# Altium PCB Adapter.PcbDoc
Units mil, origin at the board's own origin, x right, y up, seen from the top; angles counter-clockwise.
Board outline 6000 x 6000 mil, 2 copper layers (Top Layer, Bottom Layer); 94 components, 81 nets, 243 pads, 0 vias.
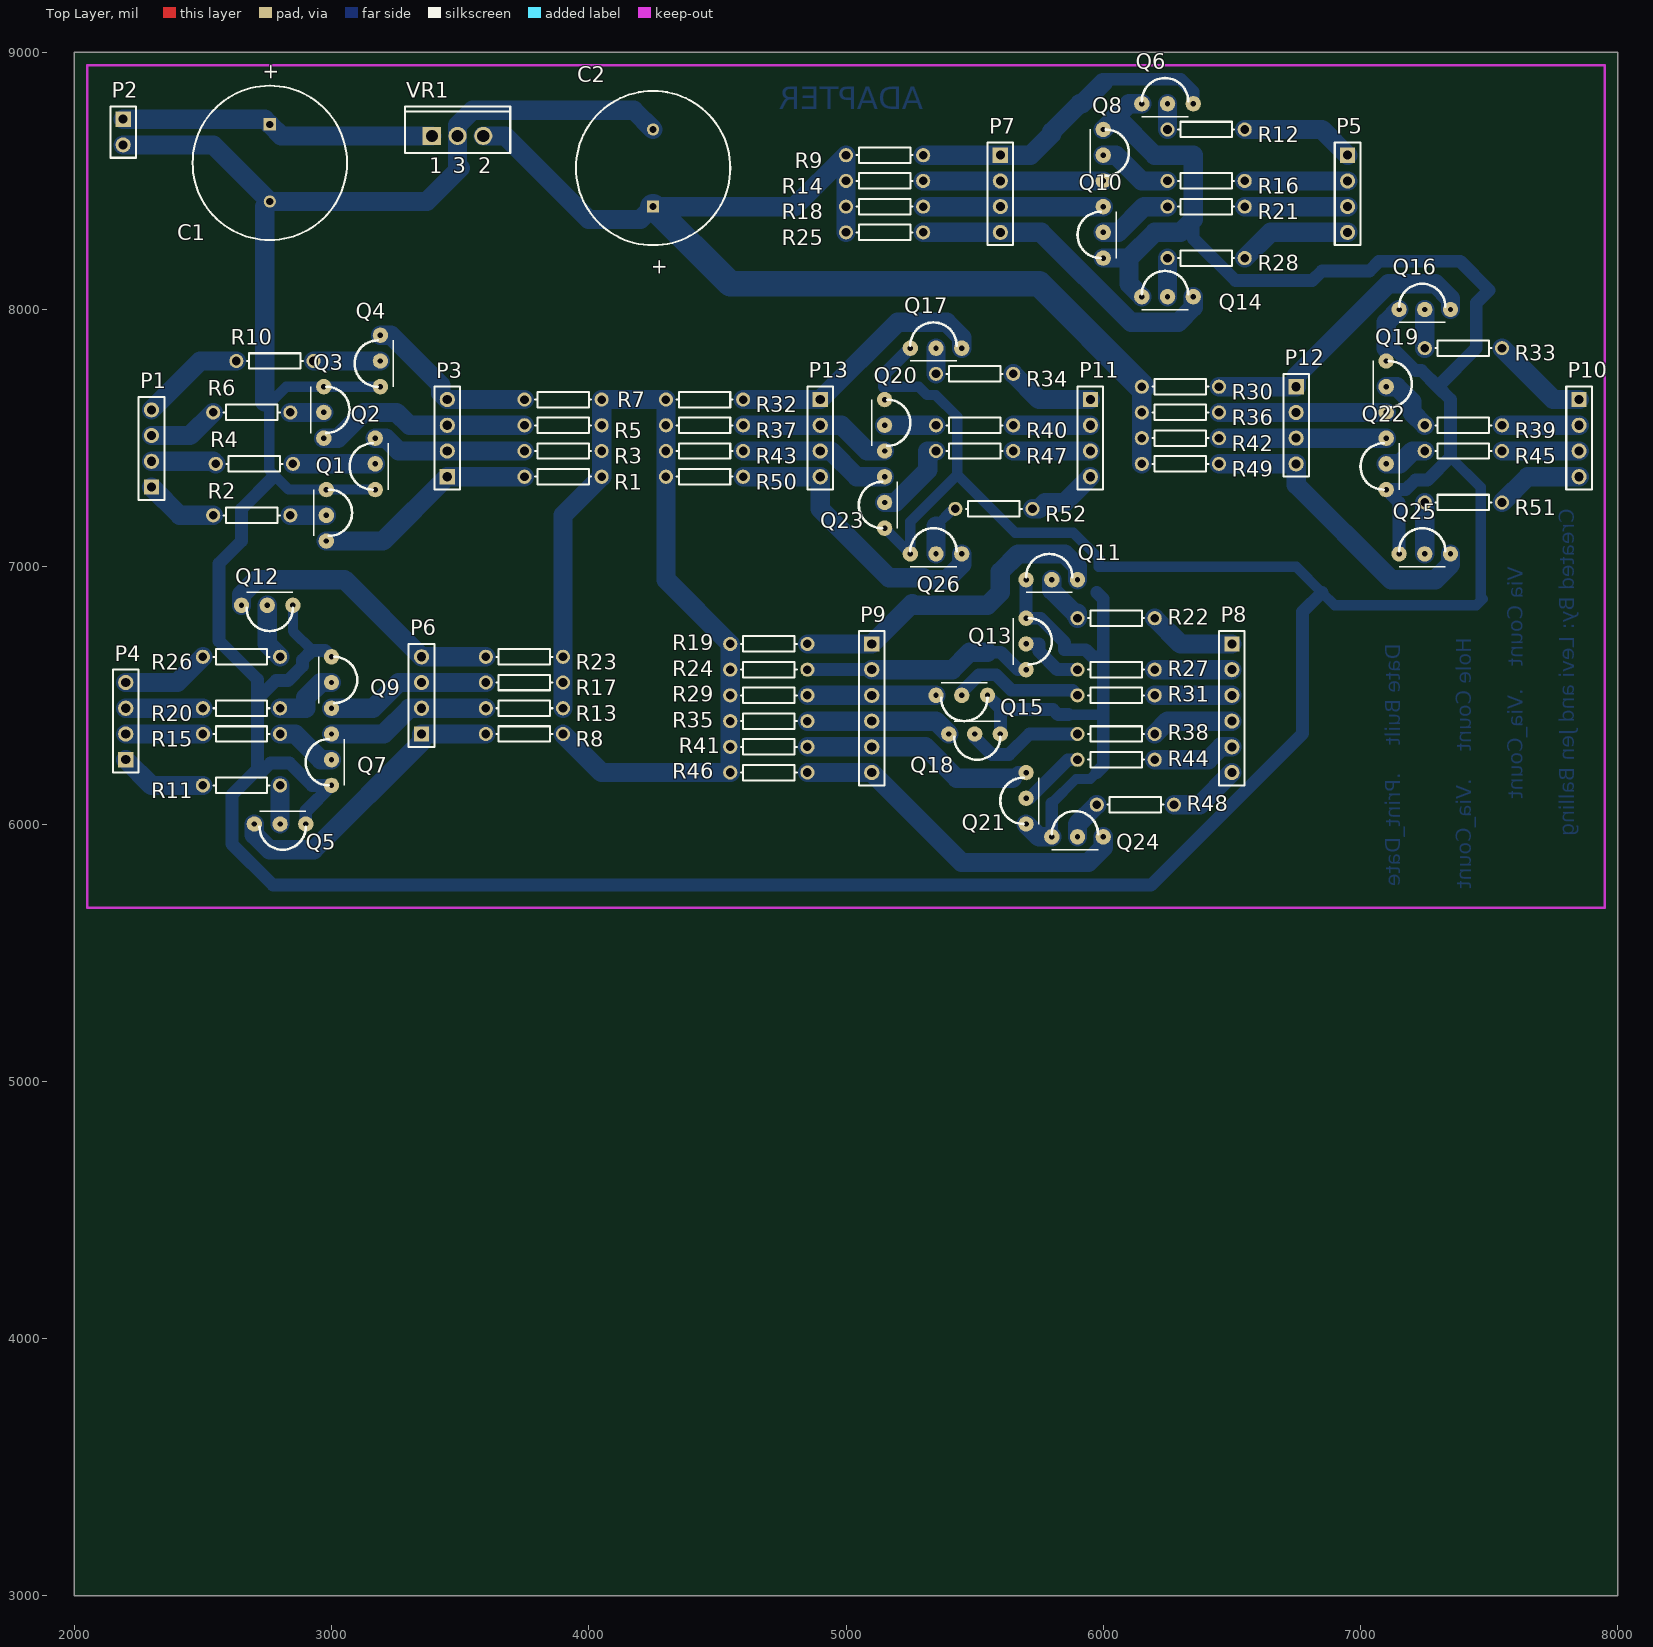
[diagram p0: Top Layer view]
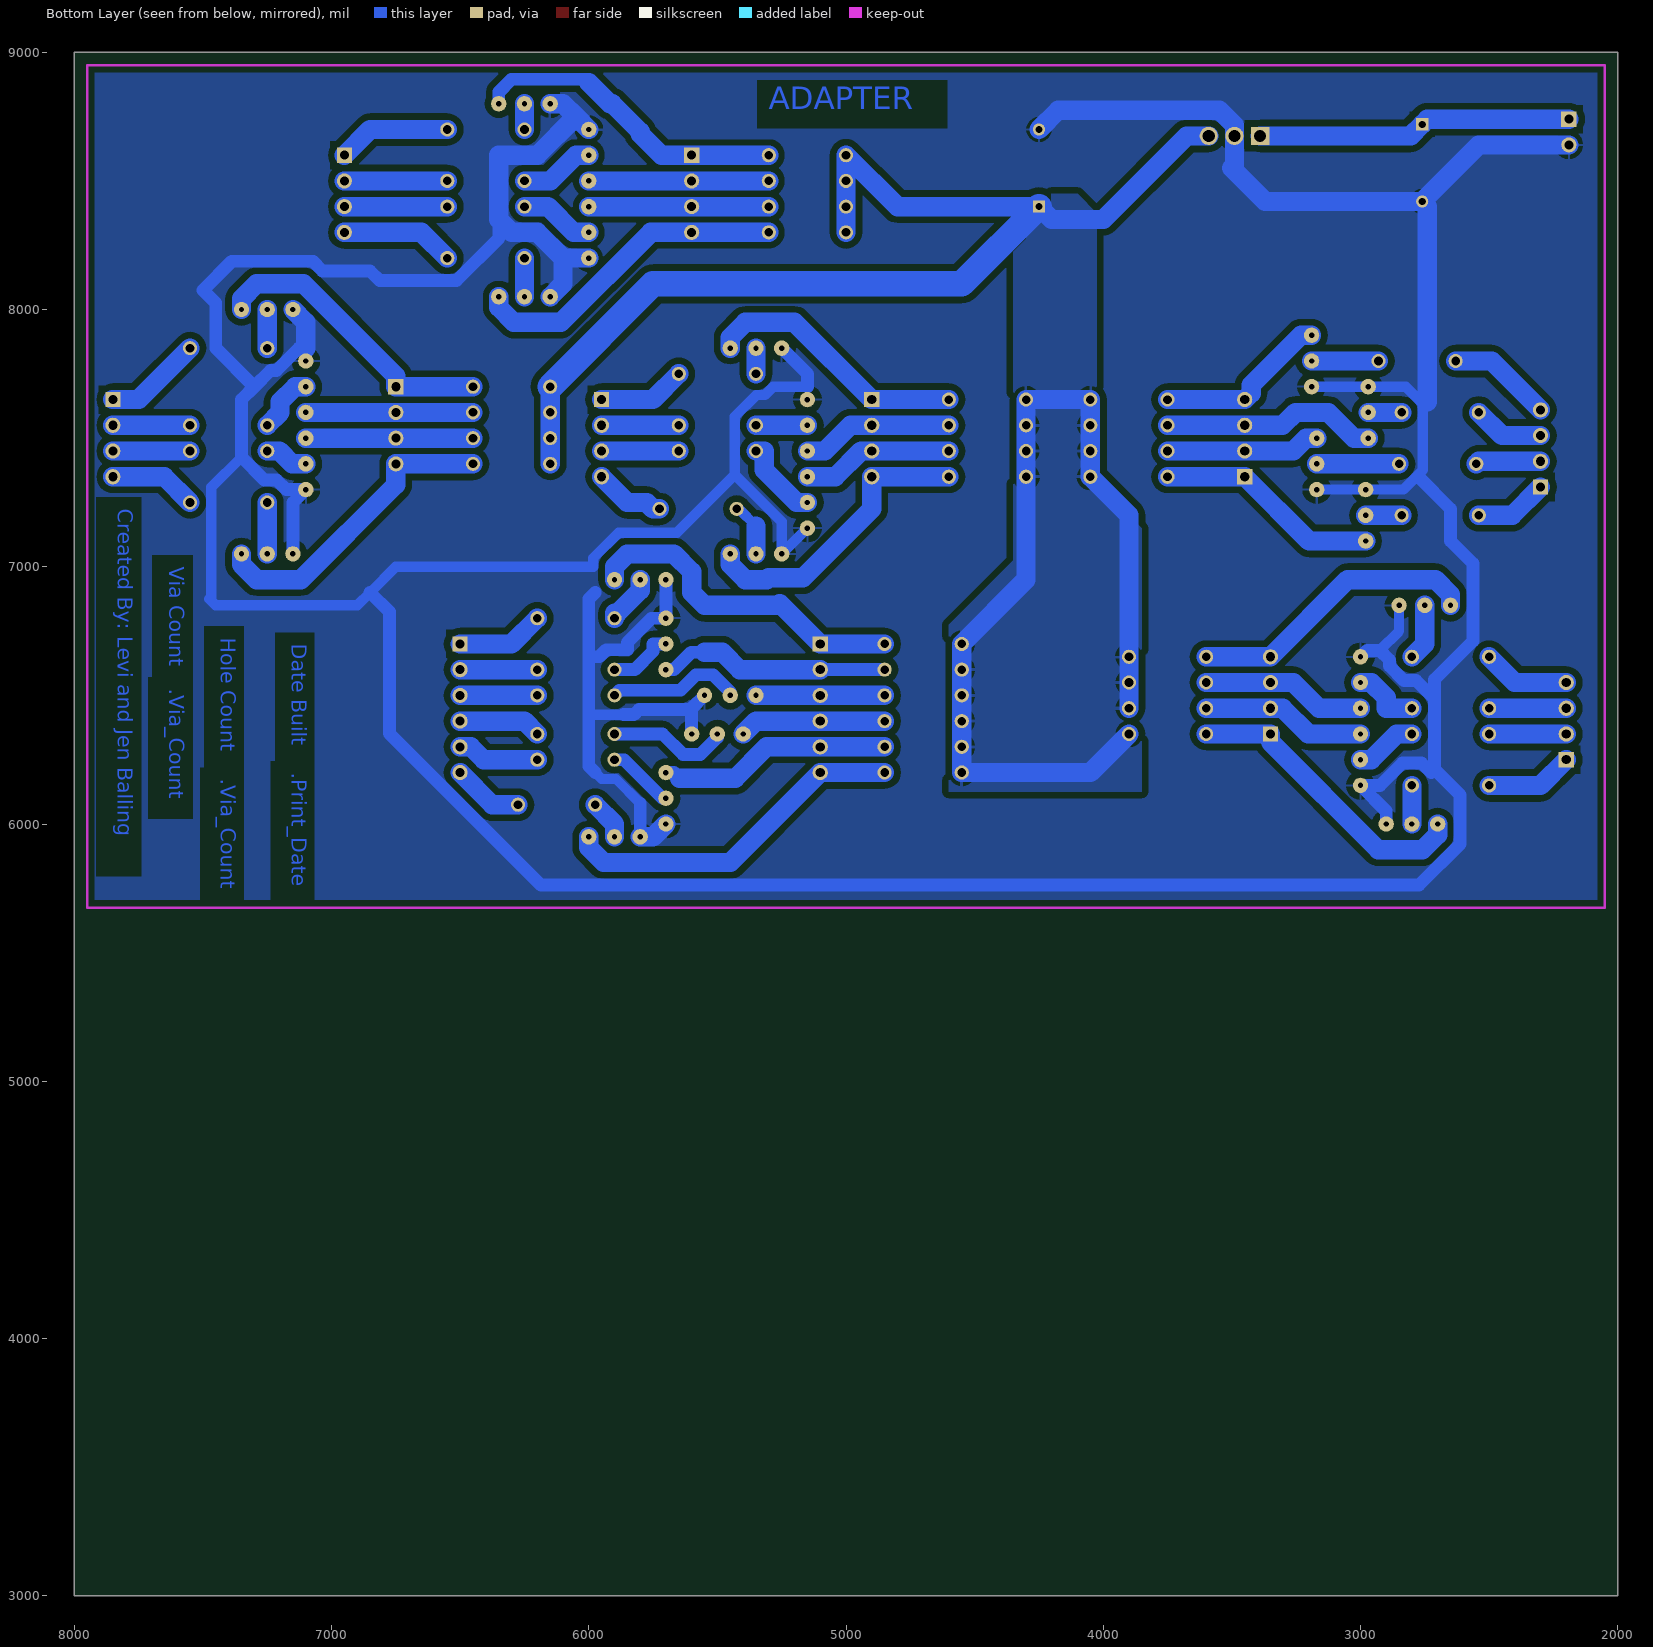
[diagram p1: Bottom Layer view, seen from below]

## Layer stack, top to bottom
Top Layer: signal copper 1.4
Dielectric: dielectric 12.6, FR-4, Dk 4.8
Bottom Layer: signal copper 1.4

## Board outline
2000,3000 8000,3000 8000,9000 2000,9000

## Design rules (kind name [scope] priority, off if disabled: settings)
Clearance [All] p1: gap=25
PolygonConnect [All] p1: connectstyle=Relief reliefconductorwidth=10 reliefentries=4 polygonreliefangle="90 Angle"
RoomDefinition Adapter [InComponentClass('Adapter')] p1: confinementstyle=ConfineIn formatcopy=TRUE lockcomponents=FALSE outline 7950,8950 2050,8950 2050,5675 7950,5675
RoutingVias [All] p1: holewidth=32 width=100 viastyle="Through Hole" minholewidth=28 minwidth=50 maxholewidth=28 maxwidth=50
SilkscreenOverComponentPads [All] p1: minsilkscreentomaskgap=10
SolderMaskExpansion [All] p1: expansion=4
Width [All] p1: maxlimit=100 minlimit=25 preferedwidth=50 minimp=50.000000 maximp=50.000000 favimp=50.000000
27 further rules are at their usual default settings.

## Components (designator, comment, footprint, x,y, rotation, side; value= is the part's Value field where it differs from the comment)
C1 "Cap Pol1" RB7.6-15 2760,8570 r90 top
C2 "Cap Pol1" RB7.6-15 4250,8550 r270 top
P1 "Header 4" HDR1X4 2300,7310 r90 top
P2 "Header 2" HDR1X2 2190,8740 r270 top
P3 "Header 4" HDR1X4 3450,7350 r90 top
P4 "Header 4" HDR1X4 2200,6250 r90 top
P5 "Header 4" HDR1X4 6950,8600 r270 top
P6 "Header 4" HDR1X4 3350,6350 r90 top
P7 "Header 4" HDR1X4 5600,8600 r270 top
P8 "Header 6" HDR1X6 6500,6700 r270 top
P9 "Header 6" HDR1X6 5100,6700 r270 top
P10 "Header 4" HDR1X4 7850,7650 r270 top
P11 "Header 4" HDR1X4 5950,7650 r270 top
P12 "Header 4" HDR1X4 6750,7700 r270 top
P13 "Header 4" HDR1X4 4900,7650 r270 top
Q1 "2N3904" 2N3904 2980,7300 r270 top
Q2 "2N3904" 2N3904 3170,7300 r90 top
Q3 "2N3904" 2N3904 2970,7700 r270 top
Q4 "2N3904" 2N3904 3190,7700 r90 top
Q5 "2N3904" 2N3904 2900,6000 r180 top
Q6 "2N3904" 2N3904 6150,8800 r0 top
Q7 "2N3904" 2N3904 3000,6150 r90 top
Q8 "2N3904" 2N3904 6000,8700 r270 top
Q9 "2N3904" 2N3904 3000,6650 r270 top
Q10 "2N3904" 2N3904 6000,8200 r90 top
Q11 "2N3904" 2N3904 5700,6950 r0 top
Q12 "2N3904" 2N3904 2850,6850 r180 top
Q13 "2N3904" 2N3904 5700,6800 r270 top
Q14 "2N3904" 2N3904 6150,8050 r0 top
Q15 "2N3904" 2N3904 5550,6500 r180 top
Q16 "2N3904" 2N3904 7150,8000 r0 top
Q17 "2N3904" 2N3904 5250,7850 r0 top
Q18 "2N3904" 2N3904 5600,6350 r180 top
Q19 "2N3904" 2N3904 7100,7800 r270 top
Q20 "2N3904" 2N3904 5150,7650 r270 top
Q21 "2N3904" 2N3904 5700,6000 r90 top
Q22 "2N3904" 2N3904 7100,7300 r90 top
Q23 "2N3904" 2N3904 5150,7150 r90 top
Q24 "2N3904" 2N3904 5800,5950 r0 top
Q25 "2N3904" 2N3904 7150,7050 r0 top
Q26 "2N3904" 2N3904 5250,7050 r0 top
R1 "Res1" AXIAL-0.3 3900,7350 r180 top
R2 "Res1" AXIAL-0.3 2690,7200 r0 top
R3 "Res1" AXIAL-0.3 3900,7450 r180 top
R4 "Res1" AXIAL-0.3 2700,7400 r0 top
R5 "Res1" AXIAL-0.3 3900,7550 r180 top
R6 "Res1" AXIAL-0.3 2690,7600 r0 top
R7 "Res1" AXIAL-0.3 3900,7650 r180 top
R8 "Res1" AXIAL-0.3 3750,6350 r180 top
R9 "Res1" AXIAL-0.3 5150,8600 r0 top
R10 "Res1" AXIAL-0.3 2780,7800 r0 top
R11 "Res1" AXIAL-0.3 2650,6150 r0 top
R12 "Res1" AXIAL-0.3 6400,8700 r180 top
R13 "Res1" AXIAL-0.3 3750,6450 r180 top
R14 "Res1" AXIAL-0.3 5150,8500 r0 top
R15 "Res1" AXIAL-0.3 2650,6350 r0 top
R16 "Res1" AXIAL-0.3 6400,8500 r180 top
R17 "Res1" AXIAL-0.3 3750,6550 r180 top
R18 "Res1" AXIAL-0.3 5150,8400 r0 top
R19 "Res1" AXIAL-0.3 4700,6700 r0 top
R20 "Res1" AXIAL-0.3 2650,6450 r0 top
R21 "Res1" AXIAL-0.3 6400,8400 r180 top
R22 "Res1" AXIAL-0.3 6050,6800 r180 top
R23 "Res1" AXIAL-0.3 3750,6650 r180 top
R24 "Res1" AXIAL-0.3 4700,6600 r0 top
R25 "Res1" AXIAL-0.3 5150,8300 r0 top
R26 "Res1" AXIAL-0.3 2650,6650 r0 top
R27 "Res1" AXIAL-0.3 6050,6600 r180 top
R28 "Res1" AXIAL-0.3 6400,8200 r180 top
R29 "Res1" AXIAL-0.3 4700,6500 r0 top
R30 "Res1" AXIAL-0.3 6300,7700 r0 top
R31 "Res1" AXIAL-0.3 6050,6500 r180 top
R32 "Res1" AXIAL-0.3 4450,7650 r0 top
R33 "Res1" AXIAL-0.3 7400,7850 r180 top
R34 "Res1" AXIAL-0.3 5500,7750 r180 top
R35 "Res1" AXIAL-0.3 4700,6400 r0 top
R36 "Res1" AXIAL-0.3 6300,7600 r0 top
R37 "Res1" AXIAL-0.3 4450,7550 r0 top
R38 "Res1" AXIAL-0.3 6050,6350 r180 top
R39 "Res1" AXIAL-0.3 7400,7550 r180 top
R40 "Res1" AXIAL-0.3 5500,7550 r180 top
R41 "Res1" AXIAL-0.3 4700,6300 r0 top
R42 "Res1" AXIAL-0.3 6300,7500 r0 top
R43 "Res1" AXIAL-0.3 4450,7450 r0 top
R44 "Res1" AXIAL-0.3 6050,6250 r180 top
R45 "Res1" AXIAL-0.3 7400,7450 r180 top
R46 "Res1" AXIAL-0.3 4700,6200 r0 top
R47 "Res1" AXIAL-0.3 5500,7450 r180 top
R48 "Res1" AXIAL-0.3 6125,6075 r180 top
R49 "Res1" AXIAL-0.3 6300,7400 r0 top
R50 "Res1" AXIAL-0.3 4450,7350 r0 top
R51 "Res1" AXIAL-0.3 7400,7250 r180 top
R52 "Res1" AXIAL-0.3 5575,7225 r180 top
VR1 "L7805CP" ISOWATT220AB 3490,8675 r0 top

## Footprints (in the part's own frame and the unit in brackets; to place one, negate y for a bottom-side part, rotate by r counter-clockwise, add the part's x,y. Pads: shape width x height; smd on the part's side, far side on the other; paste and mask are expansions set on the pad)
2N3904 [mil] "simple transistor, but bigger holes and pads"
  round 60 hole 21: 1(0,0) 2(100,0) 3(200,0)
  silkscreen extent 0,-50 180,100
AXIAL-0.3 [mm] "Axial Device, Thru-Hole; 2 Leads; 0.3 in Pin Spacing"
  round 1.4 hole 0.85: 1(-3.81,0) 2(3.81,0)
  silkscreen extent -2.77,-0.76 2.77,0.76
HDR1X2 [mm] "Connector; Header; 2 Position"
  rect 1.5x1.5 hole 0.9: 1(0,0)
  round 1.5 hole 0.9: 2(2.54,0)
  silkscreen extent -1.27,-1.27 3.81,1.27
HDR1X4 [mm] "Connector; Header; 4 Position"
  rect 1.5x1.5 hole 0.9: 1(0,0)
  round 1.5 hole 0.9: 2(2.54,0) 3(5.08,0) 4(7.62,0)
  silkscreen extent -1.27,-1.27 8.89,1.27
HDR1X6 [mm] "Connector; Header; 6 Position"
  rect 1.5x1.5 hole 0.9: 1(0,0)
  round 1.5 hole 0.9: 2(2.54,0) 3(5.08,0) 4(7.62,0) 5(10.16,0) 6(12.7,0)
  silkscreen extent -1.27,-1.27 13.97,1.27
ISOWATT220AB [mm] "TO, Thru-Hole, Vertical, Heatsink Mounted; 3 In-Line Leads; Pitch 2.54 mm; Pin sequence 1, 3, 2"
  rect 1.8x1.8 hole 1.2: 1(-2.54,0)
  round 1.8 hole 1.2: 2(2.54,0) 3(0,0)
  silkscreen extent -5.2,-1.7 5.2,2.9
RB7.6-15 [mm] "Polarized Capacitor (Radial); 2 Leads"
  rect 1.2x1.2 hole 0.7: 1(3.81,0)
  round 1.2 hole 0.7: 2(-3.81,0)
  silkscreen extent -7.62,-7.62 7.62,7.62

## Part data
C1 C2: "Polarized Capacitor (Radial)"
P1 P3 P4 P5 P6 P7 P10 P11 P12 P13: "Header, 4-Pin"
P2: "Header, 2-Pin"
P8 P9: "Header, 6-Pin"
Q1 Q2 Q3 Q4 Q5 Q6 Q7 Q8 Q9 Q10 Q11 Q12 Q13 Q14 Q15 Q16 Q17 Q18 Q19 Q20 Q21 Q22 Q23 Q24 Q25 Q26: "NPN General Purpose Amplifier"
R1 R2 R3 R4 R5 R6 R7 R8 R9 R10 R11 R12 R13 R14 R15 R16 R17 R18 R19 R20 R21 R22 R23 R24 R25 R26 R27 R28 R29 R30 R31 R32 R33 R34 R35 R36 R37 R38 R39 R40 R41 R42 R43 R44 R45 R46 R47 R48 R49 R50 R51 R52: "Resistor"
VR1: "Positive Voltage Regulator"

## Nets (pads, with @x,y where several pads share a name; then routed paths per layer and width w, separated by ;. In a path a pad name is that pad's centre, name@x,y a point inside that pad or via, vN(x,y) a via of type N, cw(c..) or ccw(c..) an arc to the next point about the centre after c; other vN are vias at no path point)
+5: C2.1 R1.1 R3.1 R5.1 R7.1 R8.1 R9.1 R13.1 R14.1 R17.1 R18.1 R19.1 R23.1 R24.1 R25.1 R29.1 R30.1 R32.1 R35.1 R36.1 R37.1 R41.1 R42.1 R43.1 R46.1 R49.1 R50.1 VR1.2 | length 8215.9
  Bottom Layer w75: VR1.2 3675,8675 4000,8350 4200,8350 C2.1 4800,8400 R9.1 R14.1 R18.1 R25.1 ; R8.1 4050,6200 R46.1 R41.1 R35.1 R29.1 R24.1 R19.1 4300,6950 R50.1 R43.1 R37.1 R32.1 R7.1 R5.1 R3.1 R1.1 3900,7200 R23.1 R17.1 R13.1 ; R49.1 R42.1 R36.1 R30.1
  Bottom Layer w100: C2.1 4550,8100 5750,8100 R30.1
+12: C1.1 P2.1 VR1.1 | length 1226.9
  Bottom Layer w75: P2.1 2740,8740 C1.1 2805,8675 VR1.1
GND: C1.2 C2.2 P2.2 Q1.1 Q2.1 Q3.1 Q4.1 Q5.1 Q6.1 Q7.1 Q8.1 Q9.1 Q10.1 Q11.1 Q12.1 Q13.1 Q14.1 Q15.1 Q16.1 Q17.1 Q18.1 Q19.1 Q20.1 Q21.1 Q22.1 Q23.1 Q24.1 Q25.1 Q26.1 VR1.3 | length 23180.9
  Bottom Layer w40: Q12.1 2850,6750 2925,6675 ; Q2.1 Q1.1 2833.33,7300 2757.5,7375.83 2757.5,7634.17 2823.33,7700 Q3.1 Q4.1 ; Q23.1 Q26.1 5250,7175 5432.5,7357.5 ; 5150,7700 5283.33,7700 5315.83,7667.5 5349.17,7667.5 5432.5,7584.17 5432.5,7357.5 ; 5800,6080.8 5894.2,6175 5950,6175 5975,6200 ; 5865.31,6425 6000,6425 ; 7350,7426.26 7467.5,7308.76 7467.5,6882.5 7475,6875 7450,6850 6900,6850 6850,6900 6750,7000 5982.5,7000 5982.5,7034.17 5884.17,7132.5 5657.5,7132.5 5432.5,7357.5
  Bottom Layer w50: 2775.63,7350.63 2650,7225 2650,7100 2562.5,7012.5 2562.5,6711.24 2712.5,6561.24 2712.5,6486.24 ; Q5.1 2900,6050 Q7.1 2923.74,6150 2836.24,6237.5 2762.5,6237.5 2725,6200 2712.5,6212.5 ; Q9.1 2975,6675 2925,6675 2887.5,6637.5 2887.5,6613.76 2831.33,6557.58 2783.84,6557.58 2712.5,6486.24 ; 5150,7700 5150,7750 Q17.1 ; Q15.1 5600,6450 ; Q18.1 5600,6450 ; Q11.1 Q13.1 5756.07,6800 5850,6706.07 5850,6677.56 5932.13,6677.56 5959.69,6650 6000,6650 ; Q24.1 5800,6080.8 ; 5865.31,6425 5825,6425 5805,6445 5605,6445 5600,6450 ; 5975,6200 6000,6225 6000,6425 6000,6650 ; 5975,6900 6000,6875 6000,6650 ; 6350,8350 6350,8276.26 6513.76,8112.5 6812.5,8112.5 6850,8150 7034.84,8150 7072.34,8187.5 7387.5,8187.5 7500,8075 7450,8025 7450,7850 7300,7700 ; 6850,6900 6775,6825 6775,6351.26 6186.24,5762.5 2772.34,5762.5 2612.5,5922.34 2612.5,6112.5 2712.5,6212.5 ; 7100,7850 7126.26,7850 7213.76,7762.5 7237.5,7762.5 7300,7700 ; Q25.1 7150,7250 Q22.1 7176.26,7300 7213.76,7337.5 7261.24,7337.5 7350,7426.26 7350,7650 7300,7700 ; 2712.5,6212.5 2712.5,6486.24
  Bottom Layer w75: P2.2 2540,8640 C1.2 ; 2745.13,7646.55 2740,7641.42 2740,8400 C1.2 ; C2.2 4175,8775 3548.58,8775 3490,8716.42 VR1.3 3490,8560 3500,8550 3370,8420 C1.2 ; Q21.1 5750,5950 Q24.1 ; Q10.1 6100,8200 ; Q8.1 6050,8750 ; Q14.1 6100,8100 6100,8200 ; Q6.1 6100,8800 6050,8750 ; 7100,7850 7100,7950 Q16.1 ; 6050,8750 6200,8600 6350,8600 6350,8350 6300,8300 6200,8300 6100,8200
NetP1_1: P1.1 R2.1 | length 285.6
  Bottom Layer w75: P1.1 2410,7200 R2.1
NetP1_2: P1.2 R4.1 | length 254.1
  Bottom Layer w75: P1.2 2540,7410 R4.1
NetP1_3: P1.3 R6.1 | length 277.3
  Bottom Layer w75: P1.3 2450,7510 R6.1
NetP1_4: P1.4 R10.1 | length 408.7
  Bottom Layer w75: P1.4 2490,7800 R10.1
NetP3_1: P3.1 Q1.3 R1.2 | length 873.6
  Bottom Layer w75: Q1.3 3200,7100 P3.1 R1.2
NetP3_2: P3.2 Q2.3 R3.2 | length 600.7
  Bottom Layer w75: Q2.3 3211.42,7500 3261.42,7450 P3.2 R3.2
NetP3_3: P3.3 Q3.3 R5.2 | length 842.1
  Bottom Layer w75: Q3.3 3025,7500 3125,7600 3252.84,7600 3302.84,7550 P3.3 R5.2
NetP3_4: P3.4 Q4.3 R7.2 | length 682
  Bottom Layer w75: Q4.3 3231.42,7900 3425,7706.42 3425,7675 P3.4 R7.2
NetP4_1: P4.1 R11.1 | length 341.4
  Bottom Layer w75: P4.1 2300,6150 R11.1
NetP4_2: P4.2 R15.1 | length 300
  Bottom Layer w75: P4.2 R15.1
NetP4_3: P4.3 R20.1 | length 300
  Bottom Layer w75: P4.3 R20.1
NetP4_4: P4.4 R26.1 | length 341.4
  Bottom Layer w75: P4.4 2400,6550 R26.1
NetP5_1: P5.1 R12.1 | length 441.4
  Bottom Layer w75: R12.1 6850,8700 P5.1
NetP5_2: P5.2 R16.1 | length 400
  Bottom Layer w75: R16.1 P5.2
NetP5_3: P5.3 R21.1 | length 400
  Bottom Layer w75: R21.1 P5.3
NetP5_4: P5.4 R28.1 | length 441.4
  Bottom Layer w75: R28.1 6650,8300 P5.4
NetP6_1: P6.1 Q5.3 R8.2 | length 1170.1
  Bottom Layer w75: Q5.3 2700,5958.58 2758.58,5900 2930.81,5900 3350,6319.19 P6.1 R8.2
NetP6_2: P6.2 Q7.3 R13.2 | length 641.4
  Bottom Layer w75: Q7.3 3202.56,6350 3302.56,6450 P6.2 R13.2
NetP6_3: P6.3 Q9.3 R17.2 | length 641.4
  Bottom Layer w75: Q9.3 3161.14,6450 3261.14,6550 P6.3 R17.2
NetP6_4: P6.4 Q12.3 R23.2 | length 1139.9
  Bottom Layer w75: Q12.3 2650,6891.42 2708.58,6950 3050,6950 P6.4 R23.2
NetP7_1: P7.1 Q6.3 R9.2 | length 1243.1
  Bottom Layer w50: 6000,8882.5 6012.5,8895 6300,8895 6350,8845 Q6.3
  Bottom Layer w75: R9.2 P7.1 5717.5,8600 5800,8682.5 5800,8691.42 5908.58,8800 5917.5,8800 6000,8882.5
NetP7_2: P7.2 Q8.3 R14.2 | length 700
  Bottom Layer w75: R14.2 P7.2 Q8.3
NetP7_3: P7.3 Q10.3 R18.2 | length 700
  Bottom Layer w75: R18.2 P7.3 Q10.3
NetP7_4: P7.4 Q14.3 R25.2 | length 1260.7
  Bottom Layer w75: R25.2 P7.4 5758.58,8300 6108.58,7950 6291.42,7950 6350,8008.58 Q14.3
NetP8_1: P8.1 R22.1 | length 341.4
  Bottom Layer w75: R22.1 6300,6700 P8.1
NetP8_2: P8.2 R27.1 | length 300
  Bottom Layer w75: R27.1 P8.2
NetP8_3: P8.3 R31.1 | length 300
  Bottom Layer w75: R31.1 P8.3
NetP8_4: P8.4 R38.1 | length 320.7
  Bottom Layer w75: R38.1 6250,6400 P8.4
NetP8_5: P8.5 R44.1 | length 320.7
  Bottom Layer w75: R44.1 6408.58,6250 6458.58,6300 P8.5
NetP8_6: P8.6 R48.1 | length 276.8
  Bottom Layer w75: R48.1 6375,6075 P8.6
NetP9_1: P9.1 Q11.3 R19.2 | length 1319.2
  Bottom Layer w75: R19.2 P9.1 5257.5,6857.5 5265,6850 5550,6850 5600,6900 5600,6980.81 5669.19,7050 5850,7050 5900,7000 Q11.3
NetP9_2: P9.2 Q13.3 R24.2 | length 905.9
  Bottom Layer w50: R24.2 P9.2 ; 5550,6667.5 5601.7,6667.5 5669.2,6600 Q13.3
  Bottom Layer w75: P9.2 5413.12,6600 5480.62,6667.5 5550,6667.5
NetP9_3: P9.3 Q15.3 R29.2 | length 500
  Bottom Layer w75: R29.2 P9.3 Q15.3
NetP9_4: P9.4 Q18.3 R35.2 | length 570.7
  Bottom Layer w75: R35.2 P9.4 5350,6400 Q18.3
NetP9_5: P9.5 Q21.3 R41.2 | length 909.7
  Bottom Layer w50: 5647.11,6177.91 5669.2,6200 Q21.3
  Bottom Layer w75: R41.2 P9.5 5308.58,6300 5430.67,6177.91 5647.09,6177.91
NetP9_6: P9.6 Q24.3 R46.2 | length 1360.7
  Bottom Layer w75: R46.2 P9.6 5450,5850 5941.42,5850 6000,5908.58 Q24.3
NetP10_1: P10.1 R33.1 | length 382.8
  Bottom Layer w75: R33.1 7750,7650 P10.1
NetP10_2: P10.2 R39.1 | length 300
  Bottom Layer w75: R39.1 P10.2
NetP10_3: P10.3 R45.1 | length 300
  Bottom Layer w75: R45.1 P10.3
NetP10_4: P10.4 R51.1 | length 341.4
  Bottom Layer w75: R51.1 7650,7350 P10.4
NetP11_1: P11.1 R34.1 | length 341.4
  Bottom Layer w75: R34.1 5750,7650 P11.1
NetP11_2: P11.2 R40.1 | length 300
  Bottom Layer w75: R40.1 P11.2
NetP11_3: P11.3 R47.1 | length 300
  Bottom Layer w75: R47.1 P11.3
NetP11_4: P11.4 R52.1 | length 276.8
  Bottom Layer w75: R52.1 5750,7225 5775,7250 5850,7250 P11.4
NetP12_1: P12.1 Q16.3 R30.2 | length 1155.6
  Bottom Layer w75: R30.2 P12.1 6750,7741.42 7108.58,8100 7291.42,8100 7350,8041.42 Q16.3
NetP12_2: P12.2 Q19.3 R36.2 | length 650
  Bottom Layer w75: R36.2 P12.2 Q19.3
NetP12_3: P12.3 Q22.3 R42.2 | length 650
  Bottom Layer w75: R42.2 P12.3 Q22.3
NetP12_4: P12.4 Q25.3 R49.2 | length 1199.4
  Bottom Layer w75: R49.2 P12.4 6750,7319.19 7119.19,6950 7291.42,6950 7350,7008.58 Q25.3
NetP13_1: P13.1 Q17.3 R32.2 | length 1039.9
  Bottom Layer w75: R32.2 P13.1 5200,7950 5391.42,7950 5450,7891.42 Q17.3
NetP13_2: P13.2 Q20.3 R37.2 | length 591.4
  Bottom Layer w75: R37.2 P13.2 4982.84,7550 5082.84,7450 Q20.3
NetP13_3: P13.3 Q23.3 R43.2 | length 591.4
  Bottom Layer w75: R43.2 P13.3 4941.42,7450 5041.42,7350 Q23.3
NetP13_4: P13.4 Q26.3 R50.2 | length 1154.6
  Bottom Layer w75: R50.2 P13.4 4900,7225 5167.5,6957.5 5301.08,6957.5 5308.58,6950 5391.42,6950 5450,7008.58 Q26.3
NetQ1_2: Q1.2 R2.2 | length 140
  Bottom Layer w75: R2.2 Q1.2
NetQ2_2: Q2.2 R4.2 | length 320
  Bottom Layer w75: R4.2 Q2.2
NetQ3_2: Q3.2 R6.2 | length 130
  Bottom Layer w75: R6.2 Q3.2
NetQ4_2: Q4.2 R10.2 | length 260
  Bottom Layer w75: R10.2 Q4.2
NetQ5_2: Q5.2 R11.2 | length 150
  Bottom Layer w75: Q5.2 R11.2
NetQ6_2: Q6.2 R12.2 | length 100
  Bottom Layer w75: R12.2 Q6.2
NetQ7_2: Q7.2 R15.2 | length 241.4
  Bottom Layer w75: R15.2 2858.58,6350 2958.58,6250 Q7.2
NetQ8_2: Q8.2 R16.2 | length 291.4
  Bottom Layer w75: Q8.2 6050,8600 6150,8500 R16.2
NetQ9_2: Q9.2 R20.2 | length 265.7
  Bottom Layer w75: R20.2 2900,6450 2900,6491.42 2958.58,6550 Q9.2
NetQ10_2: Q10.2 R21.2 | length 291.4
  Bottom Layer w75: Q10.2 6058.58,8300 6158.58,8400 R21.2
NetQ11_2: Q11.2 R22.2 | length 197.6
  Bottom Layer w75: Q11.2 5800,6908.58 5889.39,6819.19 5900,6819.19 R22.2
NetQ12_2: Q12.2 R26.2 | length 220.7
  Bottom Layer w75: Q12.2 2750,6700 R26.2
NetQ13_2: Q13.2 R27.2 | length 258.1
  Bottom Layer w50: Q13.2 5750,6700 5750,6671.49 5821.49,6600 R27.2
NetQ14_2: Q14.2 R28.2 | length 150
  Bottom Layer w75: Q14.2 R28.2
NetQ15_2: Q15.2 R31.2 | length 524
  Bottom Layer w50: Q15.2 5450,6513.14 5516.86,6580 5583.14,6580 5643.14,6520 5880,6520 R31.2
NetQ16_2: Q16.2 R33.2 | length 150
  Bottom Layer w75: R33.2 Q16.2
NetQ17_2: Q17.2 R34.2 | length 100
  Bottom Layer w75: R34.2 Q17.2
NetQ18_2: Q18.2 R38.2 | length 474
  Bottom Layer w50: Q18.2 5500,6336.86 5566.86,6270 5633.14,6270 5713.14,6350 R38.2
NetQ19_2: Q19.2 R39.2 | length 236.4
  Bottom Layer w75: Q19.2 7141.42,7700 7200,7641.42 7200,7600 R39.2
NetQ20_2: Q20.2 R40.2 | length 200
  Bottom Layer w75: Q20.2 R40.2
NetQ21_2: Q21.2 R44.2 | length 262.1
  Bottom Layer w50: Q21.2 5713.14,6100 5863.14,6250 R44.2
NetQ22_2: Q22.2 R45.2 | length 170.7
  Bottom Layer w75: Q22.2 7152.51,7400 7202.51,7450 R45.2
NetQ23_2: Q23.2 R47.2 | length 326.1
  Bottom Layer w75: Q23.2 5191.42,7250 5317.5,7376.08 5317.5,7450 R47.2
NetQ24_2: Q24.2 R48.2 | length 156.1
  Bottom Layer w75: Q24.2 5900,6000 R48.2
NetQ25_2: Q25.2 R51.2 | length 200
  Bottom Layer w75: Q25.2 R51.2
NetQ26_2: Q26.2 R52.2 | length 210.9
  Bottom Layer w40: 5350,7158.33 5416.67,7225 R52.2
  Bottom Layer w75: Q26.2 5350,7158.33

## Polygon pours and split planes (outlines as drawn)
GND on Bottom Layer "GND plane" (solid, pour order 4): 7950,5675 7950,8950 2025,8950 2050,8925 2050,5675
+5 on Bottom Layer "5 Volt Plane" (solid, pour order 2): 4025,8375 4100,8450 4300,8450 4300,8275 4350,8225 4350,8000 4350,7025 4600,6775 4600,6750 4600,6125 3850,6125 3850,7150 3925,7225 4025,7325 4025,7350 4025,8475

## Keep-outs
Keep-Out Layer:
  lines w10: 2050,5675 7950,5675 7950,8950 2050,8950 2050,5675

## Other copper
Bottom Layer:
  text "ADAPTER" at 5300,8750 h150
  text "Created By: Levi and Jen Balling" at 7850,7225 h100 r90
  text "Via Count" at 7650,7000 h100 r90
  text "Hole Count" at 7450,6725 h100 r90
  text "Date Built" at 7175,6700 h100 r90
  text ".Via_Count" at 7650,6525 h100 r90
  text ".Print_Date" at 7175,6200 h100 r90
  text ".Via_Count" at 7450,6175 h100 r90

## Silkscreen, mask and mechanical layers (free items; w line width, h text height)
Drill Drawing:
  text ".LEGEND" at 8200,3200 h60
  text "Drill Drawing." at 8200,3100 h60

## Dimensions
2050,5675 to 7950,5675 on Mechanical 1
2050,5675 to 2050,8950 on Mechanical 1

## Text inside footprints (layer, text, board x,y; h text height)
C1: Top Overlay "+" at 2789.01,8890.15 h59.06 r90
C2: Top Overlay "+" at 4250,8200 h59.06 r270
VR1: Top Overlay "3" at 3470.31,8530.31 h59.06; Top Overlay "2" at 3570.32,8530.32 h59.06; Top Overlay "1" at 3380.16,8530.32 h59.06